# Altium PCB PowerBoard.PcbDoc
Units mil, origin at the board's own origin, x right, y up, seen from the top; angles counter-clockwise.
Board outline 3917.32 x 2917.32 mil, 2 copper layers (Top Layer, Bottom Layer); 72 components, 59 nets, 287 pads, 100 vias.
Unrouted connection lines stored in the file: 1.
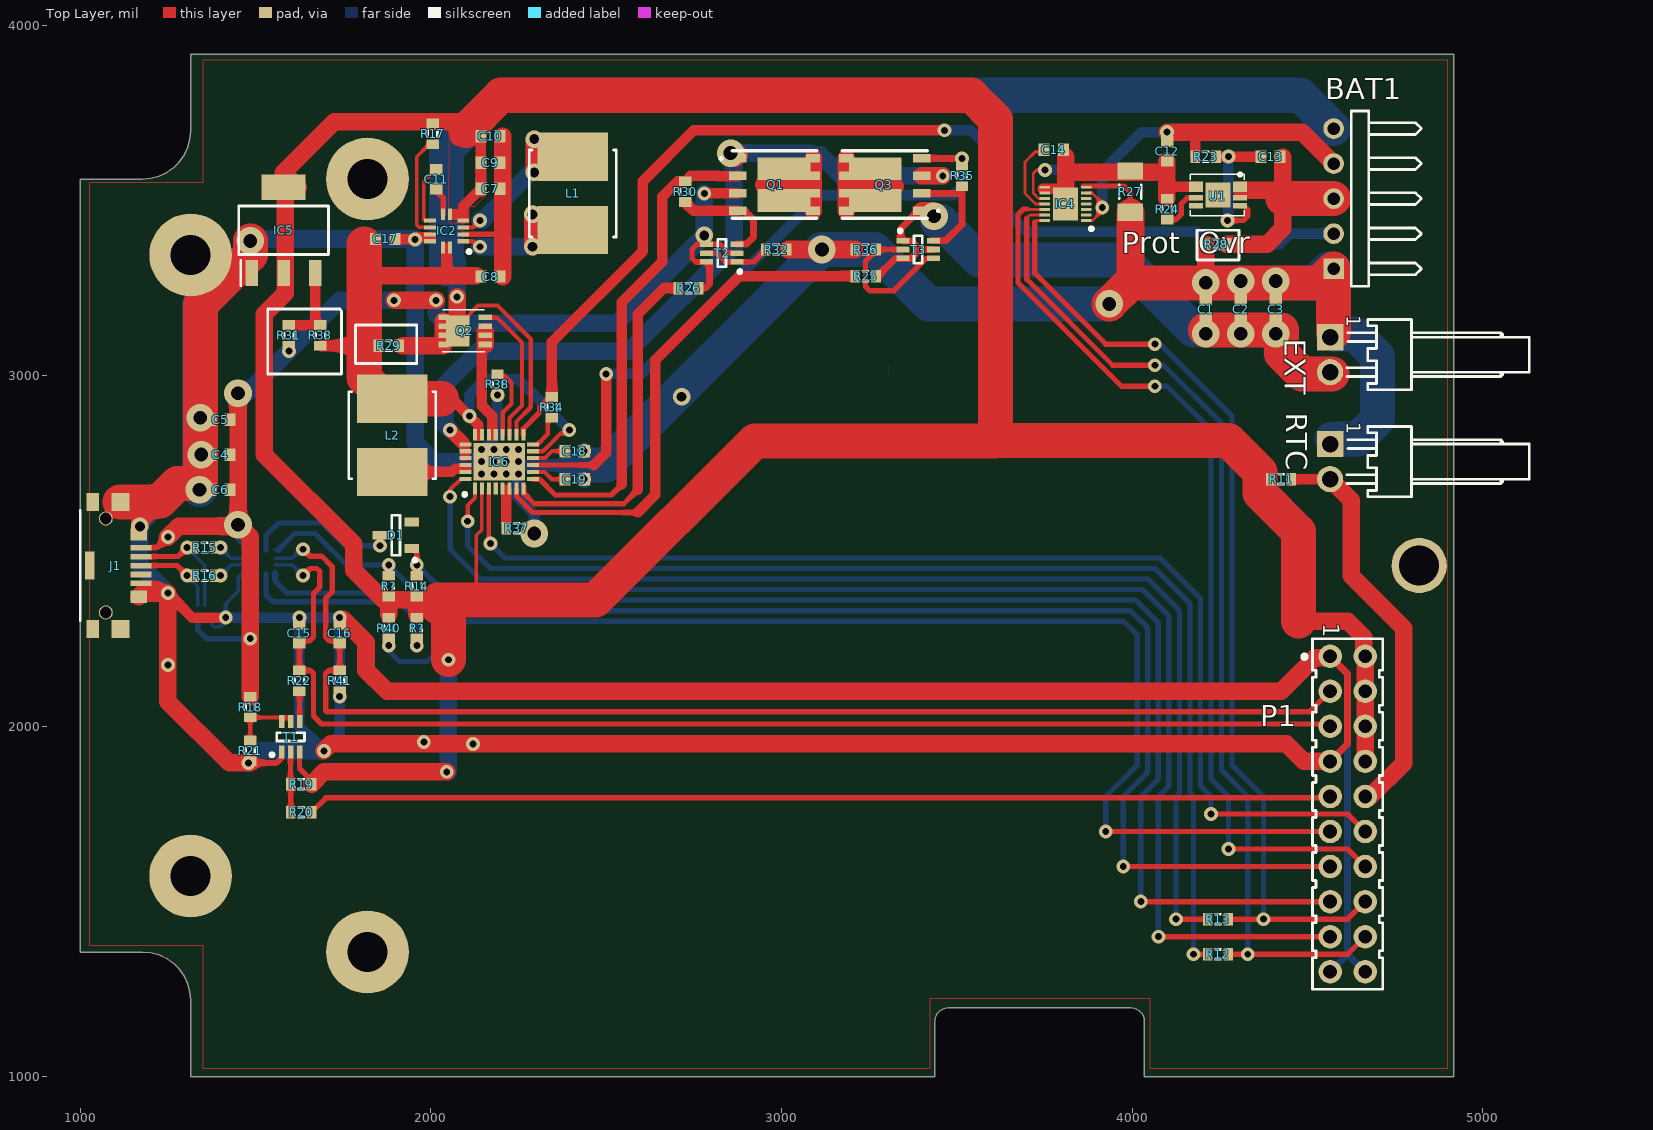
[diagram p0: Top Layer view]
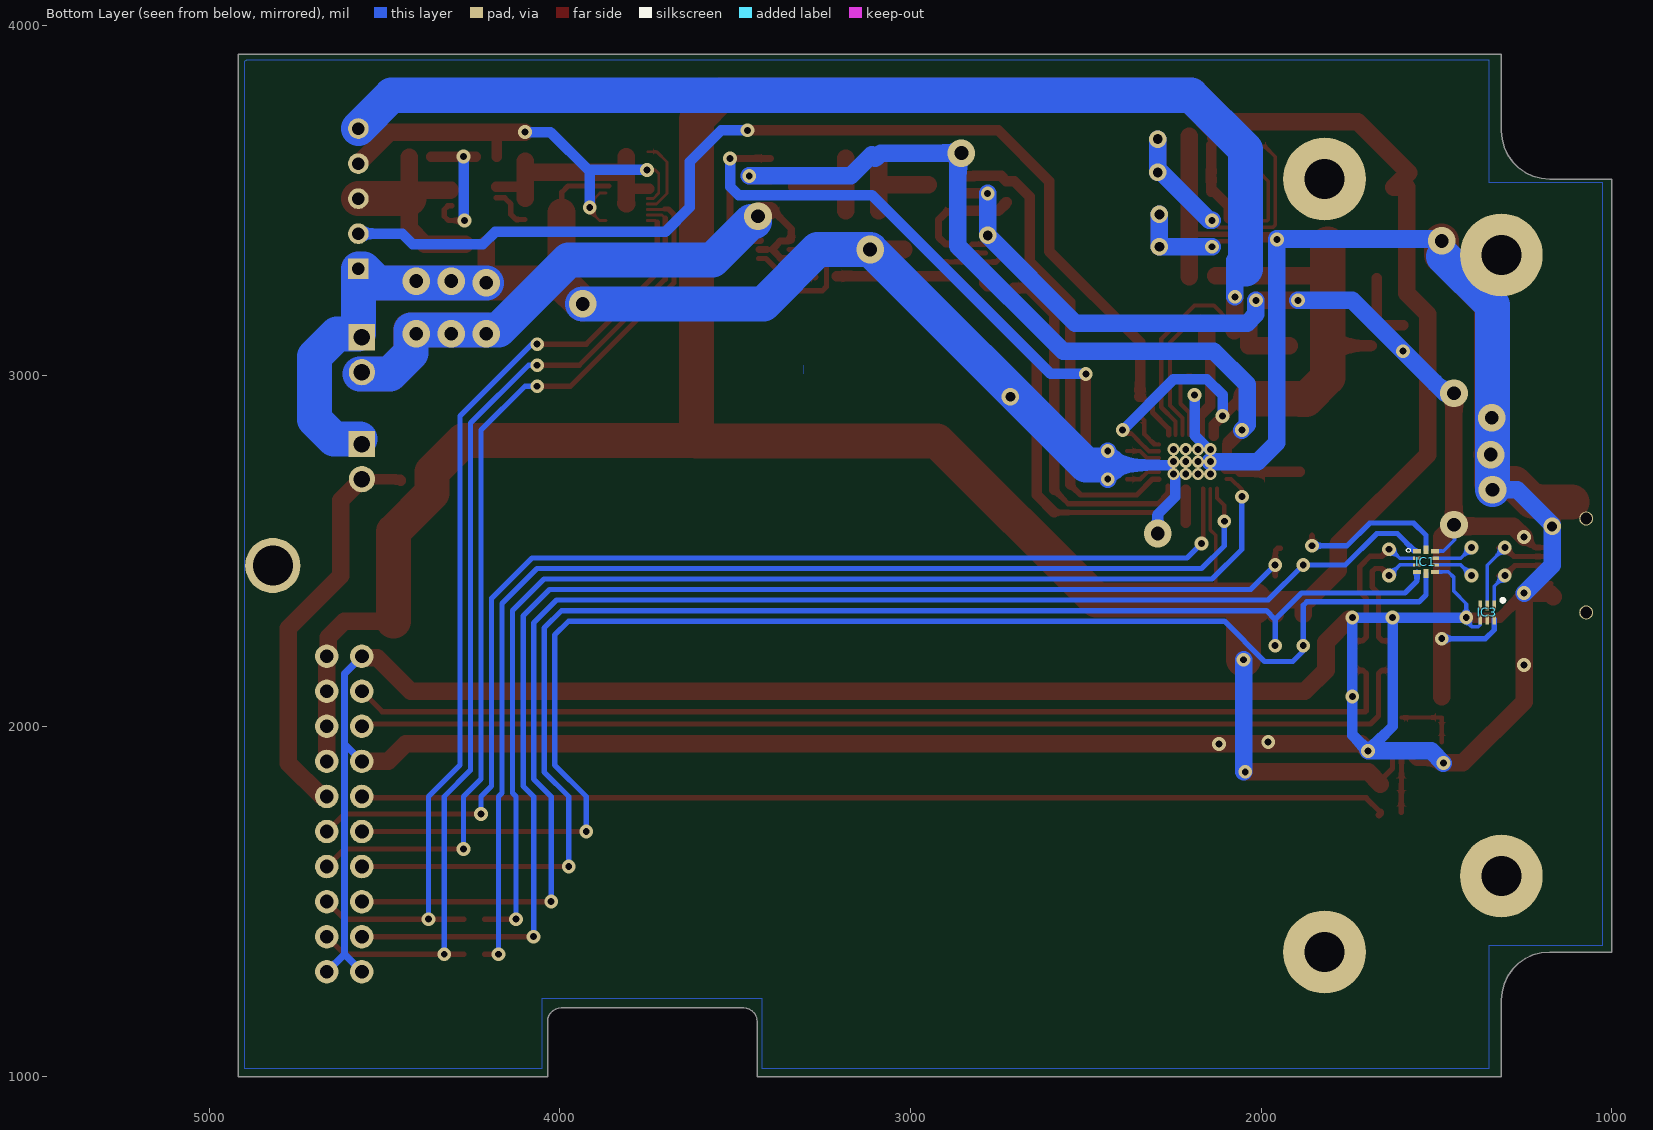
[diagram p1: Bottom Layer view, seen from below]

## Layer stack, top to bottom
Top Solder: solder mask 0.4, Solder Resist, Dk 3.5
Top Layer: signal copper 1.4
Dielectric 1: dielectric 12.6, FR-4, Dk 4.8
Bottom Layer: signal copper 1.4
Bottom Solder: solder mask 0.4, Solder Resist, Dk 3.5

## Board outline
3437.01,1000 3437.01,1157.48 3438,1166.24 3440.91,1174.56 3445.6,1182.03 3451.83,1188.26 3459.3,1192.95 3467.62,1195.86 3476.38,1196.85 3996.06,1196.85 4004.82,1195.86 4013.15,1192.95 4020.61,1188.26 4026.84,1182.03 4031.53,1174.56 4034.45,1166.24 4035.43,1157.48 4035.43,1000 4917.32,1000 4917.32,3917.32 1314.96,3917.32 1314.96,3698.82 1312.87,3674.89 1306.65,3651.69 1296.5,3629.92 1282.72,3610.25 1265.74,3593.26 1246.06,3579.48 1224.29,3569.33 1201.09,3563.12 1177.17,3561.02 1000,3561.02 1000,1356.3 1177.17,1356.3 1201.09,1354.21 1224.29,1347.99 1246.06,1337.84 1265.74,1324.06 1282.72,1307.08 1296.5,1287.4 1306.65,1265.63 1312.87,1242.43 1314.96,1218.5 1314.96,1000

## Design rules (kind name [scope] priority, off if disabled: settings)
BoardOutlineClearance [All] p1: gap=7.87 ignorepadtopadclearanceinfootprint=FALSE except(15.75: Arc-SplitBarrior Arc-SplitContinuation Track-SplitBarrior Track-SplitContinuation SMDPad-SplitBarrior SMDPad-SplitContinuation THPad-SplitBarrior THPad-SplitContinuation Via-SplitBarrior Via-SplitContinuation Fill-SplitBarrior Fill-SplitContinuation Poly-SplitBarrior Poly-SplitContinuation Region-SplitBarrior Region-SplitContinuation Text-SplitBarrior Text-SplitContinuation)
Clearance "GND Flood" [InNamedPolygon('GND_FLOOD_TOP') or InNamedPolygon('GND_FLOOD_BOTTOM')] p1: gap=20 ignorepadtopadclearanceinfootprint=FALSE
Clearance "Clearance Bottom Layer" [OnLayer('Bottom Layer')] p2: gap=6 ignorepadtopadclearanceinfootprint=TRUE except(10: Arc-Text Track-Text SMDPad-Text THPad-Text Via-Text Fill-Text Poly-Text Region-Text Text-Text)
Clearance "Clearance Top Layer" [OnLayer('Top Layer')] p3: gap=6 ignorepadtopadclearanceinfootprint=TRUE except(10: Arc-Text Track-Text SMDPad-Text THPad-Text Via-Text Fill-Text Poly-Text Region-Text Text-Text)
Clearance [All] p4: gap=7.87 ignorepadtopadclearanceinfootprint=FALSE except(3.5: Arc-Arc Arc-Track Arc-SMDPad Track-Track Track-SMDPad SMDPad-SMDPad; 5: Arc-Via Track-Via SMDPad-Via THPad-Via Via-Via; 10: Arc-Text Track-Text SMDPad-Text THPad-Text Via-Text Fill-Text Poly-Text Region-Text Text-Text)
DiffPairsRouting [All] p1: maxlimit=100 minlimit=8 mostfreqgap=20 toplayer_minwidth=8 toplayer_maxwidth=100 toplayer_prefwidth=15 bottomlayer_minwidth=8 bottomlayer_maxwidth=100 bottomlayer_prefwidth=15 maxuncoupledlength=500
HoleSize [All] p1: absolutevalues=TRUE maxlimit=248.03 minlimit=7.87 maxpercent=80.000 minpercent=20.000
MinimumAnnularRing [All] p1: minimumring=3
MinimumSolderMaskSliver [All] p1: minsoldermaskwidth=3.94
PolygonConnect PolygonConnect_1 [All] p1: thpad.connectstyle=Relief thpad.reliefconductorwidth=20 thpad.reliefentries=4 thpad.polygonreliefangle="90 Angle" thpad.airgapwidth=10 smdpad.connectstyle=Relief smdpad.reliefconductorwidth=20 smdpad.reliefentries=4 smdpad.polygonreliefangle="90 Angle" smdpad.airgapwidth=10 via.connectstyle=Direct via.reliefconductorwidth=20 via.reliefentries=4 via.polygonreliefangle="90 Angle" via.airgapwidth=10
RoutingCorners [All] p1: cornerstyle=Round minsetback=100 maxsetback=100
RoutingVias [All] p1: holewidth=19.68 width=39.37 viastyle="Through Hole" minholewidth=7.87 minwidth=17.72 maxholewidth=39.37 maxwidth=78.74
SilkToSilkClearance [All] p1: silktosilkclearance=3.94
SilkToSolderMaskClearance [IsPad] p1: minsilkscreentomaskgap=3.94 clearancetoexposedcopper=TRUE
SolderMaskExpansion [All] p1: expansion=4
UnRoutedNet [All] p1: checkbadconnections=TRUE
Width [All] p1: maxlimit=100 minlimit=3.5 preferedwidth=15
23 further rules are at their usual default settings.

## Classes and differential pairs
component class "[004] Backups": IC5 R20 R21 R22 R23
component class "[003] Connectors": BAT1 EXT1 RTC1
component class "[002] Battery": C14 C15 C16 IC4 R16 R18 U1
component class "[001] USB": C12 C13 D1 IC1 IC3 J1 R14 R15 T1
component class "[01] Power": C1 C2 C3 C4 C5 C6 C7 C8 C9 C10 C11 C17 C18 C19 IC2 IC6 L1 L2 Q1 Q2 Q3 R17 R25 R26 R30 R32 R34 R35 R36 R37 R38 T2 T3
component class "[00] Block Diagram": P1 R11 R12 R13
differential pair USB_CON: +USB_CON_P -USB_CON_N
differential pair USB_DEV: +USB_DEV_P -USB_DEV_N

## Components (designator, comment, footprint, x,y, rotation, side; value= is the part's Value field where it differs from the comment)
BAT1 "Header 5H" HDR1X5H 4575,3305 r90 top
C1 "Cap Semi" 1608[0603] 4210,3190 r270 top value=10uF
C2 "Cap Semi" 1608[0603] 4310,3190 r270 top value=1uF
C3 "Cap Semi" 1608[0603] 4410,3190 r270 top value=100nF
C4 "Cap Semi" 1608[0603] 1400,2775 r0 top value=10uF
C5 "Cap Semi" 1608[0603] 1400,2875 r0 top value=1uF
C6 "Cap Semi" 1608[0603] 1400,2675 r0 top value=100nF
C7 "Cap Semi" 1608[0603] 2170,3533 r180 top value=10uF
C8 "Cap Semi" 1608[0603] 2170,3283 r180 top value=10uF
C9 "Cap Semi" 1608[0603] 2170,3608 r180 top value=10uF
C10 "Cap Semi" 1608[0603] 2170,3683 r180 top value=10uF
C11 "Cap Semi" 1608[0603] 2015,3560 r90 top value=1nF
C12 "Cap Semi" 1608[0603] 4100,3640 r90 top value=47pF
C13 "Cap Semi" 1608[0603] 4395,3625 r180 top value=47pF
C14 "Cap Semi" 1608[0603] 3777,3644 r180 top value=100nF
C15 "Cap Semi" 1608[0603] 1625,2265 r90 top value=100nF
C16 "Cap Semi" 1608[0603] 1740,2265 r90 top value=470nF
C17 "Cap Semi" 1608[0603] 1870,3390 r180 top value=22uF
C18 "Cap Semi" 1608[0603] 2410,2785 r180 top value=47nF
C19 "Cap Semi" 1608[0603] 2410,2705 r180 top value=100nF
D1 "BAT54" SOT95P240X130-3N 1900,2545 r180 top
EXT "Header 2" MOLEX_22-05-7028 4565,3060 r270 top (schematic designator EXT1)
IC1 "BQ24392RSER" RSE(R-PUQFN-N10) 1530,2470 r270 bottom
IC2 "TPS63051RMWR" QFN50P250X250X100-12N-D 2045,3413 r180 top
IC3 "TPD4S012DRYR" SON50P100X145X60-6N 1355,2325 r270 bottom
IC4 "MAX17260SETD+" SON40P300X300X80-15N 3810,3490 r180 top
IC5 "AZ1117IH-3.3TRG1" SOT230P700X170-4N 1580,3415 r90 top
IC6 "LTC4155EUFD#PBF" QFN50P400X500X80-29N-D 2195,2755 r90 top
J1 "microUSB" "UB-MC5BR3-SDWP604-4S - custom" 1000,2458.66 r270 top
L1 "12mOhm" INDP2523X23N 2405,3520 r90 top value=1.5uH
L2 "10mOhm" INDP2523X23N 1890,2830 r90 top value=1.0uH
P1 "Header 10X2" SAMTEC_TSW-110-23-L-D 4615,1750 r270 top
Q1 "SI7938DP-T1-GE3" POWERPAK-SO8_1 2980.12,3545 r0 top
Q2 "SI7615ADN-T1-GE3" "POWERPAK1212-8 SINGLE" 2093.78,3128.07 r180 top
Q3 "SI7938DP-T1-GE3" POWERPAK-SO8_1 3294.88,3545 r180 top
R11 "Res3" J1-0603 4425,2705 r180 top value=0R
R12 "Res3" J1-0603 4245,1350 r180 top value=0R
R13 "Res3" J1-0603 4245,1450 r180 top value=0R
R14 "Res3" J1-0603 1960,2400 r270 top value=2R2
R15 "Res3" J1-0603 1355,2510 r0 top value=N/A
R16 "Res3" J1-0603 1355,2430 r0 top value=330
R17 "Res3" J1-0603 2005,3690 r90 top value=100k
R18 "Res3" J1-0603 1485,2055 r270 top value=2k7
R19 "Res3" J1-0603 1630,1835 r0 top value=10m
R20 "Res3" J1-0603 1630,1755 r0 top value=0R
R21 "Res3" J1-0603 1485,1930 r270 top value=0R
R22 "Res3" J1-0603 1625,2130 r270 top value=0R
R23 "Res3" J1-0603 4210,3625 r0 top value=0R
R24 "Res3" J1-0603 4100,3475 r90 top value=2k7
R25 "Res3" J1-0603 3240,3284 r180 top value=3k6
R26 "Res3" J1-0603 2735,3250 r180 top value=3k6
R27 "Res3" RESC3216X80N 3995,3525 r90 top value=10m (schematic designator R19)
R28 "Res3" J1-0603 4240,3375 r180 top value=0R
R29 "Res3" J1-0603 1880,3085 r180 top value=0R
R30 "Res3" J1-0603 2725,3525 r270 top value=5M
R31 "Res3" J1-0603 1595,3115 r90 top value=0R
R32 "Res3" J1-0603 2985,3360 r0 top value=47k
R33 "Res3" J1-0603 1685,3115 r90 top value=0R
R34 "Res3" J1-0603 2345,2910 r90 top value=100k
R35 "Res3" J1-0603 3515,3570 r270 top value=5M
R36 "Res3" J1-0603 3240,3360 r180 top value=47k
R37 "Res3" J1-0603 2245,2565 r180 top value=1k21
R38 "Res3" J1-0603 2190,2975 r90 top value=499
R40 "Res3" J1-0603 1880,2280 r90 top value=10k
R41 "Res3" J1-0603 1740,2130 r90 top value=N/A
R? "Res3" J1-0603 1880,2400 r270 top value=10k
R? "Res3" J1-0603 1960,2280 r90 top value=10k
RTC "Header 2" MOLEX_22-05-7028 4564.9,2755 r270 top (schematic designator RTC1)
T1 "BC847BS" SOT65P210X110-6N 1600,1970 r90 top
T2 "BC847BS" SOT65P210X110-6N 2830,3350 r180 top
T3 "BC847BS" SOT65P210X110-6N 3390,3360 r0 top
U1 "AP9211S-AK-HAC7" U-DFN2030-6 4245,3515 r270 top

## Footprints (in the part's own frame and the unit in brackets; to place one, negate y for a bottom-side part, rotate by r counter-clockwise, add the part's x,y. Pads: shape width x height; smd on the part's side, far side on the other; paste and mask are expansions set on the pad)
1608[0603] [mm] "Chip Capacitor, Body 1.6x0.8mm, IPC High Density"
  rect 0.8x0.9 smd: 1(-0.7,0) 2(0.7,0)
  body extent -0.87,-0.48 0.87,0.48, height 1.3
HDR1X5H [mm] "Connector; Header; 5 Position; Right Angle"
  rect 1.5x1.5 hole 0.9: 1(0,0)
  round 1.5 hole 0.9: 2(2.54,0) 3(5.08,0) 4(7.62,0) 5(10.16,0)
  silkscreen extent -1.27,-6.35 11.43,-1.27
INDP2523X23N [mm] "BOURNS SRN6045TA Inductor"
  rect 3.5x5.1 smd: 1(-2.65,0) 2(2.65,0)
  silkscreen extent -3.15,-3.15 3.15,3.15, body extent -3.1,-3 3.1,3, height 4.6
J1-0603 [mm] "Chip Resistor, Body 1.6x0.8mm, IPC High Density"
  rect 0.7x0.9 smd: 1(-0.75,0) 2(0.75,0)
  silkscreen extent -0.2,-0.35 0.2,0.35, body extent -0.85,-0.48 0.85,0.48, height 0.9
MOLEX_22-05-7028 [mm] "2.54mm (.100\") Pitch KK® Wire-To-Board Header, Right Angle, With Friction Lock, 2 Circuits"
  rect 1.9x1.9 hole 1.2: 1(-1.27,0.002)
  round 1.9 hole 1.2: 2(1.27,-0.002)
  silkscreen extent -2.54,1.21 2.54,14.42, body extent -2.54,-0.32 2.54,14.42, height 5.84
"POWERPAK1212-8 SINGLE" [mm]
  rect 0.99x0.405 smd: 1(-1.555,0.992) 2(-1.555,0.332) 3(-1.555,-0.328) 4(-1.555,-0.988)
  rect 0.76x0.405 smd: 5(1.43,-0.988) 6(1.43,-0.328) 7(1.43,0.332) 8(1.43,0.992)
  rect 1.725x2.235 smd: 9(0.438,0.002)
  Top Layer region: -0.432,1.118
  silkscreen extent -1.53,-1.53 1.56,1.53, body extent -2.01,-1.55 1.77,1.55, height 1.22
POWERPAK-SO8_1 [mm]
  rect 1.27x0.61 smd: 1(-2.67,1.905) 2(-2.67,0.635) 3(-2.67,-0.635) 4(-2.67,-1.905)
  rect 1.02x0.61 smd: 5(2.795,-1.905) 6(2.795,-0.635) 7(2.795,0.635) 8(2.795,1.905)
  rect 3.81x1.65 smd: 9(0.69,-1.155) 10(0.69,1.155)
  silkscreen extent -3.92,-2.45 3.08,2.45, body extent -3.24,-2.45 3.24,2.45, height 1.22
QFN50P250X250X100-12N-D [mm]
  rect 0.85x0.3 smd: 1(-1.2,0.75) 2(-1.2,0.25) 3(-1.2,-0.25) 4(-1.2,-0.75) 7(1.2,-0.75) 8(1.2,-0.25) 9(1.2,0.25) 10(1.2,0.75)
  rect 0.3x0.85 smd: 5(-0.25,-1.2) 6(0.25,-1.2) 11(0.25,1.2) 12(-0.25,1.2)
  silkscreen extent -1.75,1.38 -1.5,1.62, body extent -1.3,-1.3 1.3,1.3, height 1
QFN50P400X500X80-29N-D [mm]
  rect 0.85x0.3 smd mask+0.05: 1(-1.95,1.75) 2(-1.95,1.25) 3(-1.95,0.75) 4(-1.95,0.25) 5(-1.95,-0.25) 6(-1.95,-0.75) 7(-1.95,-1.25) 8(-1.95,-1.75) 15(1.95,-1.75) 16(1.95,-1.25) 17(1.95,-0.75) 18(1.95,-0.25) 19(1.95,0.25) 20(1.95,0.75) 21(1.95,1.25) 22(1.95,1.75)
  rect 0.3x0.85 smd mask+0.05: 9(-1.25,-2.45) 10(-0.75,-2.45) 11(-0.25,-2.45) 12(0.25,-2.45) 13(0.75,-2.45) 14(1.25,-2.45) 23(1.25,2.45) 24(0.75,2.45) 25(0.25,2.45) 26(-0.25,2.45) 27(-0.75,2.45) 28(-1.25,2.45)
  rect 2.7x3.7 smd mask+0.05: 29(0,0)
  silkscreen extent -2.5,2.37 -2.25,2.62, body extent -2.05,-2.55 2.05,2.55, height 0.8
RESC3216X80N [mm] "Chip Resistor, EIA 1206, Metric 3216, Body 3.2x1.6mm, IPC Medium Density"
  rect 1.25x1.85 smd: 1(-1.5,0) 2(1.5,0)
  silkscreen extent -0.5,-0.8 0.5,0.8, body extent -1.67,-0.87 1.68,0.88, height 0.8
RSE(R-PUQFN-N10) [mm]
  rect 0.3x0.58 smd: 1(-0.75,-0.655) 4(0.75,-0.655) 6(0.75,0.655) 9(-0.75,0.655)
  rect 0.25x0.58 smd: 2(-0.25,-0.655) 3(0.25,-0.655) 7(0.25,0.655) 8(-0.25,0.655)
  rect 0.63x0.35 smd: 5(0.86,0) 10(-0.86,0)
  silkscreen extent -0.95,-1.41 -0.67,-1.13
SAMTEC_TSW-110-23-L-D [mm] "20 Contacts - Pitch 2.54mm - Dual Row  Through Mount Straigh Header (Post Lead 5.84mm, Tail Lead 2.92mm, Insulator 2.54mm)"
  round 1.7 hole 1: 1(-11.43,-1.27) 2(-11.43,1.27) 3(-8.89,-1.27) 4(-8.89,1.27) 5(-6.35,-1.27) 6(-6.35,1.27) 7(-3.81,-1.27) 8(-3.81,1.27) 9(-1.27,-1.27) 10(-1.27,1.27) 11(1.27,-1.27) 12(1.27,1.27) 13(3.81,-1.27) 14(3.81,1.27) 15(6.35,-1.27) 16(6.35,1.27) 17(8.89,-1.27) 18(8.89,1.27) 19(11.43,-1.27) 20(11.43,1.27)
  silkscreen extent -12.7,-3.28 12.7,2.54, body extent -12.7,-2.54 12.7,2.54, height 8.38
SON40P300X300X80-15N [mm]
  rect 0.75x0.2 smd: 1(-1.5,1.2) 2(-1.5,0.8) 3(-1.5,0.4) 4(-1.5,0) 5(-1.5,-0.4) 6(-1.5,-0.8) 7(-1.5,-1.2) 8(1.5,-1.2) 9(1.5,-0.8) 10(1.5,-0.4) 11(1.5,0) 12(1.5,0.4) 13(1.5,0.8) 14(1.5,1.2)
  rect 1.8x2.4 smd: 15(0,0)
  silkscreen extent -2,1.68 -1.75,1.92, body extent -1.55,-1.5 1.55,1.5, height 0.8
SON50P100X145X60-6N [mm]
  rect 0.75x0.25 smd: 1(-0.5,0.5) 2(-0.5,0) 3(-0.5,-0.5) 4(0.5,-0.5) 5(0.5,0) 6(0.5,0.5)
  silkscreen extent -1,1 -0.75,1.25, body extent -0.55,-0.72 0.55,0.72, height 0.6
SOT65P210X110-6N [mm] "SOT363, SC70-6, SOT, 0.65mm Pitch, 6 pin, 1.25mm W X 2.00mm L X 1.10mm H, IPC Medium Density"
  rect 0.95x0.4 smd: 1(-1.1,0.65) 2(-1.1,0) 3(-1.1,-0.65) 4(1.1,-0.65) 5(1.1,0) 6(1.1,0.65)
  silkscreen extent -1.42,-1 0.3,1.47, body extent -1.2,-1.1 1.2,1.1, height 1.1
SOT95P240X130-3N [mm] "SOT23 3-Leads, Pitch 0.95mm - Body 1.3x2.9mm, IPC Medium Density"
  rect 1.05x0.65 smd: 1(-1.15,0.95) 2(-1.15,-0.95) 3(1.15,0)
  silkscreen extent -1.53,-1.45 0.3,1.92, body extent -1.25,-1.5 1.25,1.5, height 1.3
SOT230P700X170-4N [mm]
  rect 1.85x0.9 smd: 1(-3.1,2.3) 2(-3.1,0) 3(-3.1,-2.3)
  rect 1.85x3.2 smd: 4(3.1,0)
  silkscreen extent -4.03,-3.25 1.75,3.25, body extent -3.5,-3.25 3.5,3.25, height 1.7
U-DFN2030-6 [mm]
  rect 1.8x1.8 smd mask+0.05: 0(0,0)
  rect 0.75x1 smd mask+0.05: 1(-0.6,1.6) 6(-0.6,-1.6)
  rect 0.4x1 smd mask+0.05: 2(0.175,1.6) 3(0.775,1.6) 4(0.775,-1.6) 5(0.175,-1.6)
  silkscreen extent -1.6,-2 1.5,1.9, body extent -1,-1.5 2,1.5, height 1.6
"UB-MC5BR3-SDWP604-4S - custom" [mm] "JST Sealed microUSB socket"
  rect 1.3x1.3 smd: 0(-4.6,2.9) 0(4.6,2.9)
  rect 1.3x0.9 smd: 0(-4.6,0.9) 0(4.6,0.9)
  round 1.016 hole 0.85 mask+0: 0(-3.4,1.85) 0(3.4,1.85)
  rect 0.9x1.2 smd: 0(-2.25,4.25) 0(2.25,4.25)
  rect 2x0.7 smd: 0(0,0.7)
  rect 0.4x1.5 smd: 1(-1.3,4.4) 2(-0.65,4.4) 3(0,4.4) 4(0.65,4.4) 5(1.3,4.4)
  silkscreen extent -4,0 4,0, body extent -4.97,-2.15 4.97,4.55, height 3.58

## Part data
BAT1: "Header, 5-Pin, Right Angle", LatestRevisionDate=17-Jul-2002, LatestRevisionNote="Re-released for DXP Platform.", Publisher="Altium Limited"
C1 C2 C3 C4 C5 C6 C7 C8 C9 C10 C11 C12 C13 C14 C15 C16 C17 C18 C19: "Capacitor (Semiconductor SIM Model)", LatestRevisionDate=29-May-2009, LatestRevisionNote="IPC-7351 Footprint Added.", PackageDescription="Chip Capacitor", PackageReference=C1206, Published=8-Jun-2000, Publisher="Altium Limited"
D1: "Diode Schottky  Anode Pin 1 Cathode Pin 3 (Pas de pin 2)", Case=SOT23-3, Manufacturer="FAIRCHILD SEMICONDUCTOR", Power=200mA, Voltage=30V, Author="CERN DEM JLC", Bonding=No, ComponentHeight=1.30mm, Component Type=Standard, CreateDate=17.09.2009, Device=BAT54, HelpURL=\\cern.ch\dfs\Applications\Altium\Datasheets\BAT54.pdf, LatestRevisionDate=27.05.2010, Manufacturer Part Number=BAT54, Mounted=Yes, PackageDescription="SOT23 3-Leads, Pitch 0.95mm - Body 1.3x2.9mm, IPC Medium Density", Part Description="Single Small Signal Schottky Diode", Part Number=BAT54, Pin Count=3, PressFit=No, Sense=No, SMD=Yes, Socket=No
EXT RTC: "Header, 2-Pin", LatestRevisionDate=17-Jul-2002, LatestRevisionNote="Re-released for DXP Platform.", Publisher="Altium Limited"
IC1: "Integrated Circuit", Manufacturer_Name="Texas Instruments", Mouser Part Number=595-BQ24392RSER, RS Part Number=8279327, Datasheet Link=http://www.ti.com/lit/gpn/bq24392, Manufacturer_Part_Number=BQ24392RSER, Mouser Price/Stock=https://www.mouser.com/Search/Refine.aspx?Keyword=595-BQ24392RSER, RS Price/Stock=http://uk.rs-online.com/web/p/products/8279327
IC2: "Integrated Circuit", Manufacturer_Name="Texas Instruments", ComponentLink1Description="TPS6305x Datasheet", ComponentLink1URL=http://www.ti.com/lit/ds/symlink/tps63051.pdf, Datasheet Link=http://www.ti.com/lit/gpn/tps63051, Height=1mm, Manufacturer_Part_Number=TPS63051RMWR
IC3: "Integrated Circuit", Manufacturer_Name="Texas Instruments", Mouser2 Part Number=595-TPD4S012DRYR, Datasheet Link=http://www.ti.com/lit/ds/symlink/tpd4s012.pdf, Height=0.6mm, Manufacturer_Part_Number=TPD4S012DRYR, Mouser2 Price/Stock=https://www.mouser.com/Search/Refine.aspx?Keyword=595-TPD4S012DRYR
IC4: "Integrated Circuit", Manufacturer_Name="Maxim Integrated", Mouser2 Part Number=700-MAX17260SETD+, ComponentLink1Description="MAX17260 Datasheet", ComponentLink1URL=https://datasheets.maximintegrated.com/en/ds/MAX17260.pdf, ComponentLink2Description="MAX17260SETD+ (Mouser)", ComponentLink2URL=https://pl.mouser.com/ProductDetail/Maxim-Integrated/MAX17260SETD%2b?qs=sGAEpiMZZMve4%2FbfQkoj%252BAnnYqGcWj2a8PZHpMVmFSA%3D, ComponentLink3Description="MAX17260 User Guide", ComponentLink3URL=https://pdfserv.maximintegrated.com/en/an/MAX1726x-ModelGauge-m5-EZ-user-guide.pdf, Datasheet Link=https://componentsearchengine.com/Datasheets/1/MAX17260SETD+.pdf, Height=0.8mm, Manufacturer_Part_Number=MAX17260SETD+, Mouser2 Price/Stock=https://www.mouser.com/Search/Refine.aspx?Keyword=700-MAX17260SETD%2B
IC5: "Integrated Circuit", Manufacturer_Name="Diodes Inc.", Mouser2 Part Number=621-AZ1117IH-3.3TRG1, Datasheet Link=https://componentsearchengine.com/Datasheets/1/AZ1117IH-3.3TRG1.pdf, Height=1.7mm, Manufacturer_Part_Number=AZ1117IH-3.3TRG1, Mouser2 Price/Stock=https://www.mouser.com/Search/Refine.aspx?Keyword=621-AZ1117IH-3.3TRG1
IC6: "Integrated Circuit", Manufacturer_Name="Linear Technology", Datasheet Link=http://www.analog.com/media/en/technical-documentation/data-sheets/4155fd.pdf, Height=0.8mm, Manufacturer_Part_Number=LTC4155EUFD#PBF
J1: "microUSB connector"
L1: library part Inductor, "Inductor SRN6045TA-1R5Y", Code_IEC=1005, Code_JEITA=0402, ComponentLink1Description="SRN6045TA-1R5Y (Mouser)", ComponentLink1URL=https://pl.mouser.com/ProductDetail/Bourns/SRN6045TA-1R5Y?qs=sGAEpiMZZMsg%252By3WlYCkU3tyM9HcjVri8VL%2FIY%252BgGEQ%3D, LatestRevisionDate=29-May-2009, LatestRevisionNote="IPC-7351 Footprint Added.", PackageDescription="Chip Inductor", PackageReference=0402-A, Published=8-Jun-2000, Publisher="Altium Limited"
L2: library part Inductor, "Inductor SRN6045TA-1R0Y", Code_IEC=1005, Code_JEITA=0402, ComponentLink2Description="SRN6045-1R0Y (Mouser)", ComponentLink2URL=pl.mouser.com/ProductDetail/Bourns/SRN6045-1R0Y?qs=sGAEpiMZZMsg%252By3WlYCkU0o4wAoqWTm0KET%2FFU%252BpntA%3D, LatestRevisionDate=29-May-2009, LatestRevisionNote="IPC-7351 Footprint Added.", PackageDescription="Chip Inductor", PackageReference=0402-A, Published=8-Jun-2000, Publisher="Altium Limited"
P1: "Header, 10-Pin, Dual row", LatestRevisionDate=17-Jul-2002, LatestRevisionNote="Re-released for DXP Platform.", Publisher="Altium Limited"
Q1 Q3: "MOSFET (N-Channel)", Manufacturer_Name=Vishay, Datasheet Link=https://www.vishay.com/docs/65365/si7938dp.pdf, Manufacturer_Part_Number=SI7938DP-T1-GE3
Q2: "MOSFET (P-Channel)", Manufacturer_Name=Vishay, Manufacturer_Part_Number=SIS413DN-T1-GE3, ComponentLink1Description=Mouser, ComponentLink1URL=https://pl.mouser.com/ProductDetail/Vishay-Siliconix/SI7615ADN-T1-GE3?qs=sGAEpiMZZMshyDBzk1%2FWi6E1PdrpaYNpUmwK%2FZj1bgw%3D, ComponentLink2Description=Datasheet, ComponentLink2URL=https://pl.mouser.com/datasheet/2/427/si7615cdn-1018932.pdf
R11 R12 R13 R14 R15 R16 R17 R18 R19 R20 R21 R22 R23 R24 R25 R26 R27 R28 R29 R30 R31 R32 R33 R34 R35 R36 R37 R38 R40 R41 R? R?: "Resistor", LatestRevisionDate=29-May-2009, LatestRevisionNote="IPC-7351 Footprint Added.", PackageDescription="Chip Resistor", PackageReference=J1-0603, Published=8-Jun-2000, Publisher="Altium Limited"
T1 T2 T3: "45V 100mA Dual NPN General-Purpose Transistor", Case=SOT363, Manufacturer="NXP SEMICONDUCTORS", Author="CERN DEM JMW", Bonding=No, ComponentHeight=1.1mm, Component Type=Standard, CreateDate=10.07.2015, Device=BC847BS, HelpURL=\\cern.ch\dfs\Applications\Altium\Datasheets\BC847BS.pdf, LatestRevisionDate=10.07.2015, Manufacturer Part Number=BC847BS, Mounted=Yes, PackageDescription="SOT363, SC-88, SOT, 0.65mm Pitch, 6 pin, 1.25mm W X 2.00mm L X 1.10mm H, IPC Medium Density", Part Description="45V 100mA Dual NPN General-Purpose Transistor", Part Number=BC847BS, Pin Count=6, PressFit=No, Sense=No, SMD=Yes, Socket=No
U1: library part AP9211, "SINGLE CHIP SOLUTION FOR 1-CELL Li+ BATTERY PACK", ComponentLink1Description="AP9211S-AK-HAC-7 (Mouser)", ComponentLink1URL=https://pl.mouser.com/ProductDetail/Diodes-Incorporated/AP9211S-AK-HAC-7?qs=%2Fha2pyFaduhU8ORG8s%252BdQ8ce%2FFXbiZtTJujjlGEM9Y4G1qKWx8axSg%3D%3D, ComponentLink2Description="AP9211 Datasheet", ComponentLink2URL=https://www.diodes.com/assets/Datasheets/AP9211.pdf

## Free pads (board coordinates)
  round 236.22 hole 114.17: 1(1314.96,1572.83) 1(1314.96,3344.49) 1(1818.9,1356.3) 1(1818.9,3561.02)
  round 157.48 hole 114.17: 1(4818.9,2458.66)

## Via types
v1: diameter 39.37, hole 19.68, Top Layer to Bottom Layer, tented top, 64 vias
v2: diameter 78.74, hole 39.37, Top Layer to Bottom Layer, tented top, 17 vias
v3: diameter 35, hole 19.68, Top Layer to Bottom Layer, tented top, 12 vias
v4: diameter 50, hole 28, Top Layer to Bottom Layer, tented top, 7 vias

## Nets (pads, with @x,y where several pads share a name; then routed paths per layer and width w, separated by ;. In a path a pad name is that pad's centre, name@x,y a point inside that pad or via, vN(x,y) a via of type N, cw(c..) or ccw(c..) an arc to the next point about the centre after c; other vN are vias at no path point)
3V3: C7.2 C9.2 C10.2 IC2.4 IC2.5 IC5.2 IC5.4 IC6.2 P1.2 P1.4 P1.6 P1.8 R11.2 R14.2 R17.2 R19.2 R40.2 R?.2 T1.3 | length 10188.7
  Top Layer w10: R14.2 1963.94,2370.47 1972.72,2379.25 2124.25,2379.25 2130,2385 2130,2545 2145.08,2560.08 2145.08,2677.52 IC6.2
  Top Layer w15: T1.3@1625,1928.39 1625.37,1928.01 1625.37,1879.63 1660,1845 1660,1835.47 R19.2
  Top Layer w30: 2085,3460 2063.94,3460 2063.94,3458.51 2083.57,3458.51 2092.24,3449.84 2092.24,3482.8 2139.72,3530.28 2141.69,3530.28 C7.2@2142.44,3531.03 ; C7.2@2142.44,3525.44 C7.2@2142.44,3531.03 ; 2142.44,3658 C9.2 C7.2 C7.2@2142.44,3531.03
  Top Layer w50: R19.2@1659.92,1835.08 1695.07,1870.24 v1(2045.24,1870.24) ; R40.2@1880,2320 R?.2@1880,2360.47 ; R?.2@1960,2320 1960,2340 2020,2340 ; R14.2@1960,2360.47 R?.2@1880,2360.47 ; 2080,3680 C10.2@2130,3680 ; 2100,3725 1725,3725 1579.31,3579.31 1614.07,3544.55 1621.57,3537.05 1585,3537.05 1585,3235 1525,3175 1525,2775 1780,2520 1780,2445 1864.53,2360.47 R?.2@1880,2360.47 ; 4475,2300 4615,2300 4660.47,2254.53 4660.47,2206.98 4665,2202.45 P1.2 P1.4 P1.6 P1.8
  Top Layer w100: 2020,2340 2020,2360 2470,2360 2924.31,2814.31 3610.69,2814.31 3610.69,3730.74 3541.42,3800 2200,3800 2100,3700 ; v1(2050,2190) 2050,2360 ; 3590,2815 4275,2815 4365,2725 4365,2665 4475,2555 4475,2300
  Bottom Layer w50: v1@2050,1870.24 v1(2050,2190)
BAT_ALRT: IC4.12 P1.14 | length 2624
  Top Layer w8: 3705,3474.25 IC4.12
  Top Layer w15: 3701.25,3475.6 3690.6,3475.6 3675,3460 3675,3265 3970,2970 v1(4065,2970) ; v1(4275,1650) 4615,1650 P1.14
  Bottom Layer w15: v1(4065,2970) 4100,2970 4225,2845 4225,1850 4275,1800 v1(4275,1650)
BAT_GND: BAT1.3 C13.1 R28.1 U1.1 U1.2 | length 669.1
  Top Layer w30: 4307.99,3522.01 U1.1@4312.99,3528.62 ; U1.1 4309.76,3538.62 U1.1@4310,3538.86
  Top Layer w50: R28.1 4385,3375 4430,3420 4430,3505 4430,3528.62 ; U1.1@4312.99,3528.62 4430,3528.62 ; C13.1@4430,3622.56 4430,3528.62 ; 4445,3528.62 4430,3528.62
  Top Layer w100: 4430,3505 BAT1.3
BAT_NTC: BAT1.2 IC6.15 R34.2 | length 3118.9
  Top Layer w15: IC6.15 2263.9,2848.9 2310,2895 2310,2909.53 R34.2@2340,2939.53
  Top Layer w30: R34.2@2347.72,2940.75 2346.5,2939.53 R34.2 2345,3095 2605,3355 2605,3555 2750,3700 v1(3465,3700)
  Bottom Layer w30: v1(3465,3700) 3540,3700 3630,3610 3630,3480 3700,3410 4185,3410 4220,3375 4420,3375 4450,3405 BAT1.2
BAT_SCL: IC4.14 P1.16 R13.1 | length 2801.4
  Top Layer w8: 3722.76,3437.76 3727.76,3442.76 IC4.14
  Top Layer w15: 3722.76,3437.76 3722.76,3292.24 3925,3090 v1(4065,3090) ; R13.1 v1(4375,1450) 4615,1450 P1.16
  Bottom Layer w15: v1(4065,3090) 4065,3095 4070,3100 4285,2885 4285,1890 4375,1800 v1(4375,1450)
BAT_SDA: IC4.13 P1.18 R12.1 | length 2911.5
  Top Layer w8: 3700,3450 3708.5,3458.5 IC4.13
  Top Layer w15: 3700,3450 3700,3275 3945,3030 v1(4065,3030) ; R12.1 v1(4330,1350) 4615,1350 P1.18
  Bottom Layer w15: v1(4065,3030) 4090,3030 4255,2865 4255,1875 4330,1800 v1(4330,1350)
BAT_SNS: BAT1.4 C12.2 IC4.1 IC4.6 IC4.10 R23.1 | length 1354.4
  Top Layer w8: IC4.10 3733.37,3505.75 3718,3521.12 3718,3577 3728,3587 v1(3752,3587) ; IC4.1 3887.19,3442.76 3915,3470.56 v1(3915,3480) 3909,3486 3909,3498.65 3886.21,3521.43 3869.12,3521.43 IC4.6
  Top Layer w30: 4175,3695 4180.47,3689.53 R23.1
  Top Layer w50: v1(4100,3695) 4175,3695 4485,3695 BAT1.4
  Bottom Layer w30: v1(3752,3587) 3911,3587 3915,3583 ; v1(3915,3480) 3915,3583 ; v1(4100,3695) 4027,3695 3915,3583
CHG_AL: IC1.4 P1.13 R?.1@1960,2250.47 | length 3965.8
  Top Layer w15: v1(3975,1600) P1.13
  Bottom Layer w15: IC1.4 1555.79,2414.21 1590,2380 1885,2380 1960,2305 ; v1(1960,2230) 1960,2305 ; v1(3975,1600) 3975,1800 4045,1870 4045,2280 3995,2330 1985,2330 1960,2305
CHG_DET: D1.1 P1.17 R14.1 | length 3711.3
  Top Layer w15: D1.1 1953.15,2507.6 1958.45,2502.3 1958.45,2494.43 1960,2492.87 v1(1960,2460) R14.1 ; v1(4075,1400) P1.17
  Bottom Layer w15: v1(1960,2460) 2030,2390 4030,2390 4105,2315 4105,1830 4075,1800 v1(4075,1400)
CHG_IRQ: IC6.3 P1.12 | length 3359.6
  Top Layer w12: IC6.3 2165,2677.76 2165,2510 2170,2515 v1(2170,2521.25)
  Top Layer w15: v1(4225,1750) 4615,1750 P1.12
  Bottom Layer w15: v1(2170,2521.25) 2211.25,2480 4080,2480 4195,2365 4195,1830 4225,1800 v1(4225,1750)
CHG_SCL: IC6.28 R13.2 | length 3353.4
  Top Layer w12: v1(2055,2655) 2055,2675 2085.79,2705.79 IC6.28
  Top Layer w15: v1(4125,1450) R13.2
  Bottom Layer w15: v1(2055,2655) 2055,2505 2140,2420 4045,2420 4135,2330 4135,1810 4125,1800 v1(4125,1450)
CHG_SDA: IC6.1 R12.2 | length 3344.9
  Top Layer w12: v1(2105,2585) 2105,2630 2126.1,2651.1 IC6.1
  Top Layer w15: v1(4175,1350) R12.2
  Bottom Layer w15: v1(2105,2585) 2105,2515 2170,2450 4065,2450 4165,2350 4165,1810 4175,1800 v1(4175,1350)
GND: BAT1.1 C1.1 C2.1 C3.1 C4.1 C5.1 C6.1 C7.1 C8.1 C9.1 C10.1 C11.1 C15.2 C16.2 C17.1 C18.1 C19.1 EXT.1 IC1.6 IC2.2 IC2.6 IC2.9 IC2.10 IC3.4 IC4.7 IC5.1 IC6.29 J1.0 J1.5 P1.1 P1.7 P1.19 P1.20 pad.1 R21.2 R27.1 R28.2 R32.2 R36.2 R37.1 R38.1 R41.1 RTC.1 T1.1 | length 19580.6
  Top Layer w15: J1.5 1222.52,2407.48 v1(1250,2380) ; R21.2@1485,1895.47 1560.47,1895.47 1573.82,1908.82 T1.1@1573.82,1928.39 ; C11.1@2005,3537.44 2006.97,3537.44 2015.22,3529.19 2015.22,3527.23 2035.16,3507.28 IC2.6 ; IC2.2 2190,3403.16 ; IC4.7@3861,3541 3869.06,3541 3977,3541 3995,3523 R27.1@3995,3466.97
  Top Layer w20: P1.7 4615,1950 4615,2150 P1.1
  Top Layer w30: v1(1250,2380) 1320,2310 v1(1415,2310) ; 1913.81,3388.75 v1(1955,3388.75) 1961.25,3395 2000,3395 ; R38.1@2185.47,2945 v1(2190,2945)
  Top Layer w50: J1.0@1167.33,2370.08 1177.25,2380 v1(1250,2380) v1(1250,2175) 1250,2070 1424.53,1895.47 R21.2@1485,1895.47 ; v4(1170,2570) 1170,2585 1224.76,2639.76 ; 1215,2642.5 1227.5,2642.5 ; v1(1695,1930) 1715,1950 1980,1950 v1(2120,1950) 4440,1950 4490,1900 P1.7 ; C16.2@1750,2305 1815,2240 1815,2160 1875,2100 4425,2100 4520.47,2195.47 4560.47,2195.47 P1.1 ; C8.1@2205,3283 C10.1@2205,3683 ; R32.2@3020,3360 v2(3115.24,3360) R36.2 ; R27.1 R27.1@3995,3466.97 ; v2(4210,3265) 4210,3374.53 R28.2
  Top Layer w80: R27.1 3995,3270 4000,3265 v2@4180,3265
  Top Layer w100: J1.0@1114.18,2639.76 1212.26,2639.76 1215,2642.5 ; 1227.5,2642.5 1277.44,2692.44 1342.44,2692.44 v2@1342.44,2775 ; 1342.44,3202.44 v2(1342.44,2880) 1342.44,2777.56 v2(1345,2775) ; 1345,3205 1485,3345 v2(1485,3384.45) ; v2(3935,3205) 3995,3265 4000,3265 v2(4210,3265) 4310,3265 4410,3265 4535,3265 BAT1.1 4575,3265 4575,3200 EXT.1@4575,3125
  Bottom Layer w10: IC3.4 1374.76,2305.24 1374.76,2292.62 1375,2292.39 1375,2290 1380.86,2284.14 1399.14,2284.14 1415,2300 v1(1415,2310) 1415,2350 1450,2385 1450,2424.61 1465.86,2440.47 IC1.6
  Bottom Layer w20: P1.19 4615,1350 ; P1.7 4615,1950 ; P1.1 4615,2150 4615,1950 ; P1.20 4615,1350 ; 4615,1350 4615,1750 4615,1950
  Bottom Layer w30: v1(1415,2310) v1(1625,2310) ; v3@2150,2790 2190,2830 v1@2190,2935 ; v3(2250,2720) 2245,2715 2245,2655 2295,2605 v2(2295,2550) ; v3(2250,2755) 2260,2745 2437.56,2745 ; v1(1625,2310) 1625,2000 v1(1695,1930) 1740,1975 v1(1740,2085) v1(1740,2310) v1(1625,2310)
  Bottom Layer w50: v1(1250,2380) 1170,2460 v4(1170,2570) 1170,2575 1270,2675 v2(1340,2675) ; v2(1345,2775) v2@1345,2880 ; v1(1480,1895) 1515,1930 v1(1695,1930) ; v2(1485,3384.45) 1490.55,3390 1955,3390 v1(1955,3388.75) ; v1@1956,3388.75 1956,2809 2010,2755 v3(2145,2755) ; v1(2437.56,2705) 2437.56,2745 v1(2437.56,2785)
  Bottom Layer w100: v2(1340,2675) 1340,3201.1 1479.45,3340.55 ; 2437.56,2745 2500,2745 v2@3115,3360 ; v2(3115.24,3360) 3265,3360 3420,3205 v2(3935,3205) ; v2(4210,3265) 4310,3265 4410,3265 4520,3265 4560,3305 BAT1.1 4575,3200 4575,3120 4576.25,3118.75 4636.25,3118.75 4700,3055 4700,3000 4700,2875 4645,2820 RTC.1@4570,2820
  other v1: 1980,1955
  other v2: 4310,3270 4410,3270
  other v3: 2145,2720 2180,2720 2215,2720 2180,2755 2215,2755 2145,2790 2180,2790 2215,2790 2250,2790
  other v4: 2715,2940
GOOD_BAT: IC1.5 P1.11 R40.1 | length 4002.5
  Top Layer w15: v1(3925,1700) P1.11
  Bottom Layer w15: IC1.5 1530,2375 1550,2355 1870,2355 1880,2345 v1(1880,2230) 1880,2215 1910,2185 1990,2185 2105,2300 3975,2300 4015,2260 4015,1890 3925,1800 v1(3925,1700)
NetC11_2: C11.2 IC2.7 | length 176.7
  Top Layer w10: IC2.7 1982.47,3442.53 1980,3445 1980,3555 2005,3580 C11.2@2005,3592.56
NetC12_1: C12.1 C14.1 IC4.8 IC4.9 IC4.15 R24.2 R27.2 U1.6 | length 650.4
  Top Layer w30: 3745,3532.89 IC4.15@3781.92,3532.89 ; IC4.15 IC4.15@3810,3501.81 ; 4100,3538.49 4100.14,3538.62 U1.6
  Top Layer w50: IC4.15 IC4.15@3810.94,3490.94 ; IC4.15@3810.94,3490 IC4.15@3810.94,3490.94 ; 3810.94,3625 3810.94,3580 ; IC4.15@3811.87,3491.87 IC4.15@3810.94,3490.94 ; R27.2@3989.06,3580 3810.94,3580 ; R27.2@4000.94,3580 4098.97,3580 ; R24.2@4098.97,3505.56 4098.97,3580 ; C12.1@4098.97,3611.41 4098.97,3580 ; IC4.15@3810.94,3490.94 3810.94,3580
NetC13_2: C13.2 R23.2 U1.3 | length 431.3
  Top Layer w15: v1@4280,3450 v1(4272.5,3442.5) 4317.5,3442.5 4330,3455 4330,3474.29 4319.8,3484.49 U1.3
  Top Layer w30: R23.2 v1(4275,3625) C13.2
  Bottom Layer w30: v1(4272.5,3442.5) 4275,3445 4273.75,3446.25 4273.75,3623.75 v1(4275,3625)
NetC14_2: C14.2 IC4.11 | length 224.8
  Top Layer w8: C14.2@3749.44,3639 3724,3639 3695,3610 3695,3520 3725,3490 IC4.11
NetC18_2: C18.2 IC6.12 | length 99.3
  Top Layer w12: IC6.12 2291.55,2764.94 2325.85,2764.94 2345.91,2785 C18.2
NetC19_2: C19.2 IC6.10 | length 99.5
  Top Layer w12: IC6.10 2324.53,2725.47 2345,2705 C19.2
NetD1_3: D1.3 IC1.10 | length 437.7
  Top Layer w15: D1.3 1854.86,2544.86 1854.86,2515.14 v1(1855,2515)
  Bottom Layer w15: IC1.10 1530,2545 1565,2580 1690,2580 1755,2515 v1(1855,2515)
NetIC1_7: IC1.7 R16.2 | length 132.2
  Top Layer w10: R16.2 v1(1400,2430)
  Bottom Layer w10: v1(1400,2430) 1430.16,2460.16 IC1.7
NetIC1_8: IC1.8 R15.2 | length 132.2
  Top Layer w10: R15.2 v1(1400,2510)
  Bottom Layer w10: v1(1400,2510) 1430.16,2479.84 IC1.8
NetIC2_1: IC2.1 L1.1 | length 388.2
  Top Layer w12: IC2.1 2119.46,3383.47 2134.93,3368 v1(2140,3368)
  Top Layer w50: v4(2290,3368) v4(2290,3460)
  Bottom Layer w50: v1(2140,3368) v4(2290,3368) v4(2290,3460)
NetIC2_3: IC2.3 L1.2 | length 457.9
  Top Layer w12: IC2.3 2119.46,3422.84 2139.61,3443 v1(2140,3443)
  Top Layer w50: v4(2295,3580) v4(2295,3675)
  Bottom Layer w50: v1(2140,3443) 2148,3443 2285,3580 v4(2295,3580) v4(2295,3675)
NetIC2_8: IC2.8 R17.1 | length 295.4
  Top Layer w10: IC2.8 1967.16,3422.84 1960,3430 1960,3625 1988.88,3653.88 1998.41,3653.88 R17.1
NetIC5_3: IC5.3 R31.2 R33.2 | length 229.1
  Top Layer w30: R31.2 R33.2 1670,3159.53 IC5.3@1670,3277.4
NetIC6_5: IC6.5 IC6.6 R37.2 | length 95
  Top Layer w30: R37.2@2215,2580 2215,2620 2215,2675
NetIC6_7: IC6.7 R25.2 | length 1511.6
  Top Layer w15: IC6.7 2244.21,2656.18 2290.4,2610 2590,2610
  Top Layer w30: 2590,2610 2640,2660 2640,3044 2880,3284 R25.2
NetIC6_8: IC6.8 R26.2 | length 1020
  Top Layer w15: IC6.8@2265.49,2685 2265.49,2664.6 2295.09,2635 2550,2635 2590,2675
  Top Layer w30: 2590,2675 2590,3175 2665.5,3250.5 R26.2@2705,3250.5
NetIC6_14: IC6.14 R34.1 | length 108.2
  Top Layer w12: IC6.14 2304.21,2804.21 2333.28,2833.28 2333.28,2872.69 2341.06,2880.47 R34.1
NetIC6_17: IC6.17 Q2.4 | length 410.7
  Top Layer w12: Q2.4@2156.22,3165 2190,3165 2260,3095 2260,2915 2224.53,2879.53 IC6.17
NetIC6_18: IC6.18 R38.2 | length 196.7
  Top Layer w12: R38.2@2200,3000 2210,3000 2230,2980 2230,2920 2205,2895 IC6.18@2205,2831.93
NetIC6_19: IC6.19 IC6.20 Q2.1 Q2.2 Q2.3 | length 319.3
  Top Layer w30: 2145,3100 2145,2915 2175,2885 2175,2829.15
  Top Layer w50: Q2.1 Q2.2 2155,3125
NetIC6_26: IC6.26 IC6.27 L2.1 | length 215
  Top Layer w30: L2.1 2060,2725.67 2069.33,2735 2101.17,2735
NetP1_10: P1.10 R11.1 RTC.2 | length 1167.6
  Top Layer w30: R11.1@4454.53,2700 4454.53,2701.5 4455.75,2702.72 4467.53,2702.72 4469.81,2705 4565,2705 RTC.2@4559.44,2710.56
  Top Layer w50: RTC.2@4565,2705 4625,2645 4625,2430 4775,2280 4775,1895 4680,1800 P1.10
NetQ1_4: Q1.4 R30.2 T2.3 | length 321.5
  Top Layer w20: T2.3 2900.59,3375.59 2920,3395 2920,3445 2897.01,3467.99 2877.01,3467.99 Q1.4
  Top Layer w30: R30.2 2726.5,3495.47 2727.72,3494.25 2727.72,3492.76 2750.47,3470 Q1.4
NetQ1_5: Q1.5 Q1.6 Q1.7 Q1.8 Q1.9 Q1.10 | length 290.2
  Top Layer w50: 2950,3545 3090.16,3545 ; Q1.5 Q1.6 3090.16,3545 ; Q1.8 Q1.7 3090.16,3545
NetQ3_2: Q3.2 R35.2 T3.6 | length 328.9
  Top Layer w20: Q3.2 3515,3520 ; T3.6@3428.63,3386.37 3469.68,3386.37 3515,3431.7 3515,3520 ; R35.2 3515,3520
NetQ3_5: Q3.5 Q3.6 Q3.7 Q3.8 Q3.9 Q3.10 | length 290.2
  Top Layer w50: Q3.8 Q3.7 3184.84,3540 ; Q3.5 Q3.6 3184.84,3540 ; 3325,3540 3184.84,3540
NetR18_2: R18.2 R21.1 T1.5 T1.6 | length 185.4
  Top Layer w12: R21.1@1485,1954.53 R18.2 1563.35,2025.47 1573.82,2025 T1.5@1599.41,2025
NetR19_1: R19.1 R20.1 T1.2 | length 173.8
  Top Layer w15: T1.2@1599.41,1928.39 1599.41,1836.06 R19.1 R20.1
NetR22_2: R22.2 T1.4 | length 87.4
  Top Layer w15: R22.2 1625.59,2099.88 T1.4
NetR24_1: R24.1 U1.5 | length 125.5
  Top Layer w15: R24.1 4125.47,3445.47 4140,3460 4140,3490 4157.74,3507.74 4181.63,3507.74 U1.5
NetR32_1: R32.1 T2.1 T2.5 | length 194.1
  Top Layer w15: T2.5 T2.5 2815.04,3349.96 2840,3325 2856.75,3325 2856.96,3324.78 2872.93,3324.78 T2.1 2919.88,3324.41 R32.1
NetR36_1: R36.1 T3.2 T3.4 | length 433.2
  Top Layer w15: T3.2 R36.1 3271,3358.53 3240,3327.53 3240,3254 3252,3242 3320,3242 3412.04,3334.04 3432.93,3334.04 T3.4
SW_OPEN: IC1.1 P1.15 R?.1@1880,2429.53 | length 3997.2
  Top Layer w15: v1(4025,1500) P1.15 P1.15@4570,1500
  Bottom Layer w15: IC1.1@1564,2502 1612,2550 1670,2550 1760,2460 v1(1880,2460) 1980,2360 4010,2360 4075,2295 4075,1850 4025,1800 v1(4025,1500)
USB_CON_N: IC3.2 J1.2 R15.1 | length 349.1
  Top Layer w10: v1(1305,2510) R15.1
  Top Layer w15: J1.2 1279.25,2484.25 v1(1305,2510)
  Bottom Layer w10: v1(1305,2510) 1355.32,2459.68 IC3.2@1355.32,2344.68
USB_CON_P: IC3.1 J1.3 R16.1 | length 262
  Top Layer w10: v1(1305,2430) R16.1
  Top Layer w15: J1.3 1276.34,2458.66 v1(1305,2430)
  Bottom Layer w10: v1(1305,2430) 1335.32,2399.68 IC3.1
USB_DEV_N: C16.1 IC1.2 P1.3 R41.2 | length 3567.8
  Top Layer w15: v1(1635,2505) 1635.97,2505 1655.97,2485 1689.16,2485 1718.45,2455.71 1718.45,2383.08 1700,2364.63 1700,2255 1711.14,2243.86 1733.58,2243.86 C16.1 R41.2 1708.79,2159.53 1700,2150.74 1700,2114.76 1700,2043.79 1702.29,2041.5 4506.5,2041.5 P1.3
  Bottom Layer w10: IC1.2 1604.84,2479.84 1630,2505 v1(1635,2505)
USB_DEV_P: C15.1 IC1.3 P1.5 R22.1 | length 3548.3
  Top Layer w15: v1(1635,2430) 1635.97,2430 1655.97,2450 1674.66,2450 1683.45,2441.21 1683.45,2397.57 1665,2379.13 1665,2255 1653.86,2243.86 1631.42,2243.86 C15.1 R22.1 1656.21,2159.53 1665,2150.74 1665,2100.27 1665,2029.29 1687.79,2006.5 4558.5,2006.5 P1.5
  Bottom Layer w10: IC1.3 1604.84,2460.16 v1(1635,2430)
USB_PU: P1.9 R20.2 | length 2931.8
  Top Layer w15: R20.2 1700.59,1796.06 P1.9@4565,1796.06
  Top Layer w20: R20.2 1659.53,1751.06 R20.2@1663.31,1747.28
USBGT: IC6.9 Q1.2 R30.1 | length 1391.6
  Top Layer w15: IC6.9@2292.24,2705 2310,2705 2355,2660 2515,2660 2545,2690
  Top Layer w30: 2545,2690 2545,3210 2660,3325 2660,3510 2704.53,3554.53 R30.1 2726.5,3554.53 2741.97,3570 2819.62,3570 2819.99,3569.63 2874.63,3569.63 Q1.2
VBAT: BAT1.5 IC6.16 Q2.5 Q2.6 Q2.7 Q2.8 Q2.9 R29.1 | length 3914.5
  Top Layer w12: Q2.9@2080,3155 2090,3155 2135,3200 2190,3200 2285,3105 2285,2910 2244.21,2869.21 IC6.16
  Top Layer w50: R29.1@1920,3085 2035,3085 2035,3115 2035,3140.98 2035,3155 ; v1(2075,3225) 2074.76,3224.76 2074.76,3166.97 2074.76,3129.77 Q2.9
  Bottom Layer w50: v1(2075,3225) 2075,3330
  Bottom Layer w100: 2045,3305 2045,3645 2200,3800 4480,3800 BAT1.5
VBUS: C4.2 C5.2 C6.2 IC1.9 IC3.6 J1.1 Q1.3 R18.1 R26.1 R31.1 T2.2 T2.4 T2.6 | length 3610.6
  Top Layer w15: J1.1 1219.84,2509.84 v1(1250,2540) ; T2.6 2755.59,3324.41 2745,3335 2745,3360 2760.22,3375.22 2786.32,3375.22 T2.4 2787.07,3375.22 2803.04,3375.22 2803.25,3375 2825,3375 2849.63,3350.37 2872.93,3350.37 T2.2
  Top Layer w20: R18.1 1485,2105 ; R26.1 2783.28,3250 2795,3261.72 T2.6@2795,3322.28
  Top Layer w30: v1(2780,3520) Q1.3
  Top Layer w50: v1(1250,2540) 1280.71,2570.71 1450,2570.71 v2(1450,2575) ; v2(1450,2950) v2(1450,2575) ; R18.1 1485,2105 v1(1485,2250) 1485,2540 v2(1450,2575) ; v1(1895,3215) v1(2015,3215)
  Bottom Layer w10: v2@1448.74,2555 1448.74,2531.26 1480.47,2499.53 IC1.9
  Bottom Layer w15: IC3.6 1335.32,2274.68 1360,2250 v1(1485,2250)
  Bottom Layer w50: v2(1450,2950) 1475,2950 v1(1595,3070) 1740,3215 v1(1895,3215) ; v1(2015,3215) 2015,3175 2040,3150 2530,3150 v4(2780,3400) v1(2780,3520)
VDC: C1.2 C2.2 C3.2 EXT.2 Q3.1 R25.1 T3.1 T3.3 T3.5 | length 2200.1
  Top Layer w15: T3.5@3432.93,3360.37 T3.5
  Top Layer w20: R25.1@3272.12,3281.41 3325.12,3334.41 T3.3 3370.3,3334.41 3381.39,3345.5 3381.39,3346.39 3395,3360 3381.39,3373.61 3381.39,3374.5 3372.02,3383.87 3348.41,3383.87 T3.1 3342.13,3385.59 3340,3387.72 3340,3419 3388.99,3467.99 3397.99,3467.99 Q3.1 ; 3409.63,3360.37 T3.5@3432.93,3360.37
  Top Layer w50: Q3.1 3430,3470 3435,3465 v2(3435,3455)
  Top Layer w100: v2@4210,3130 4310,3130 4426.25,3130 4426.25,3063.75 4485,3005 EXT.2@4570,3005
  Bottom Layer w100: v2@3445,3440 3455,3440 3565,3330 3975,3330 4175,3130 4410,3130 4425,3130 4425,3065 4485,3005 EXT.2@4570,3005
  other v2: 4210,3120 4310,3120 4410,3120
VIN: IC6.23 IC6.24 IC6.25 Q1.1 Q3.3 | length 2271.9
  Top Layer w15: IC6.23@2090,2810 2090,2764.84 IC6.25 ; IC6.25@2103.54,2765 IC6.23@2103.54,2804.21
  Top Layer w40: v1(2055,2845) IC6.23@2090,2810
  Top Layer w50: v2(2855,3635) 2870,3620 Q1.1@2880,3630 ; Q3.3 v1(3460,3570)
  Bottom Layer w50: v1(2055,2845) 2040,2860 2040,2975 2135,3070 2565,3070 2865,3370 2865,3610 2855,3620 v2(2855,3635) 3085,3635 3100,3620 3110,3630 3170,3570 v1(3460,3570)
VSYS: C8.2 C17.2 IC2.11 IC2.12 IC6.13 IC6.21 IC6.22 L2.2 R29.2 R33.1 | length 1803
  Top Layer w12: IC6.13 2291.55,2784.62 2320.08,2784.62 2348,2812.54 2348,2813 2370.03,2835.03 v1@2395.03,2835.03 ; v1@2395,2835.06 v1(2395,2845)
  Top Layer w30: R33.1 1810,3085.47 ; 2045,3285 2045,3365 ; 2060,2935 v1(2110,2885) 2135,2860 2135,2829.38
  Top Layer w50: 1844,3285 2045,3285 C8.2@2130,3285
  Top Layer w100: 1810,3075 1810,2995 1872.56,2932.44 1888.11,2932.44 L2.2 2030.67,2934.33 ; 1810,3085.47 1810,3375
  Bottom Layer w30: v1(2110,2885) 2110,2945 2155,2990 2250,2990 v1(2395,2845)
WALLGT: IC6.11 Q3.4 R35.1 | length 1879.2
  Top Layer w15: IC6.11 2465.16,2745.16
  Top Layer w20: Q3.4 v1(3514.53,3620)
  Top Layer w30: 2465.16,2745.16 2500,2780 v1(2500,3005)
  Bottom Layer w30: v1(2500,3005) 2600,3005 3110.37,3515.37 3460.01,3515.37 3460.38,3515 3490,3515 3514.53,3539.53 v1(3514.53,3620)
pads on no net: D1.2 IC3.3 IC3.5 IC4.2 IC4.3 IC4.4 IC4.5 IC6.4 J1.4 U1.0 U1.4

## Polygon pours and split planes (outlines as drawn)
GND on Top Layer "GND_FLOOD_TOP" (solid, remove dead copper, shelved, pour order 42): 1025,1375 1350,1375 1350,1025 3425,1025 3425,1225 4050,1225 4050,1025 4900,1025 4900,3900 1350,3900 1350,3550 1025,3550
3V3 on Top Layer "NONET_L01_P040" (solid, shelved, pour order 40): 2049,3444 2056,3437 2109,3437 2109,3483 2125,3483 2157,3515 2157,3701 2051,3701
GND on Bottom Layer "GND_FLOOD_BOTTOM" (solid, remove dead copper, shelved, pour order 44): 1025,1375 1025,3550 1350,3550 1350,3900 4895,3900 4900,3895 4900,1025 4050,1025 4050,1225 3425,1225 3425,1025 1350,1025 1350,1375

## Other copper
Top Layer:
  pour cut-out: 1760,2975 1760,2690 2015,2690 2015,2975
  pour cut-out: 2260,3700 2550,3700 2550,3340 2260,3340
  pour cut-out: 2255.68,3715.21
  pour cut-out: 2279.73,3714.31
  pour cut-out: 5380,1900
  region: 2345,3353
  region: 2345,3353
Bottom Layer:
  pour cut-out: 2275,3700
  pour cut-out: 2300,3305
  pour cut-out: 2550,3700 2260,3700 2260,3340 2550,3340

## Silkscreen, mask and mechanical layers (free items; w line width, h text height)
Top Overlay:
  lines w8: 1535,3005 1745,3005 1745,3185 1740,3190 1535,3190 1535,3005 ; 1785,3035 1785,3145 1960,3145 1960,3035 1785,3035 ; 4185,3330 4185,3415 4305,3415 4305,3330 4185,3330
  text "Prot  Ovr" at 3970,3350 h60

## Text inside footprints (layer, text, board x,y; h text height)
EXT: Top Overlay "1" at 4612.07,3171.91 h39.37 r270; Mechanical 14 "1" at 4612.07,3171.91 h39.37 r270
P1: Top Overlay "1" at 4545.4,2293.38 h47.24 r270
RTC: Top Overlay "1" at 4611.97,2866.91 h39.37 r270; Mechanical 14 "1" at 4611.97,2866.91 h39.37 r270